# Altium PCB BSPD_2025.PcbDoc (part 2 of 2)
Units mm, origin at the board's own origin, x right, y up, seen from the top; angles counter-clockwise.
Board outline 53 x 50 mm, 2 copper layers (Top Layer, Bottom Layer); 77 components, 28 nets, 170 pads, 103 vias.
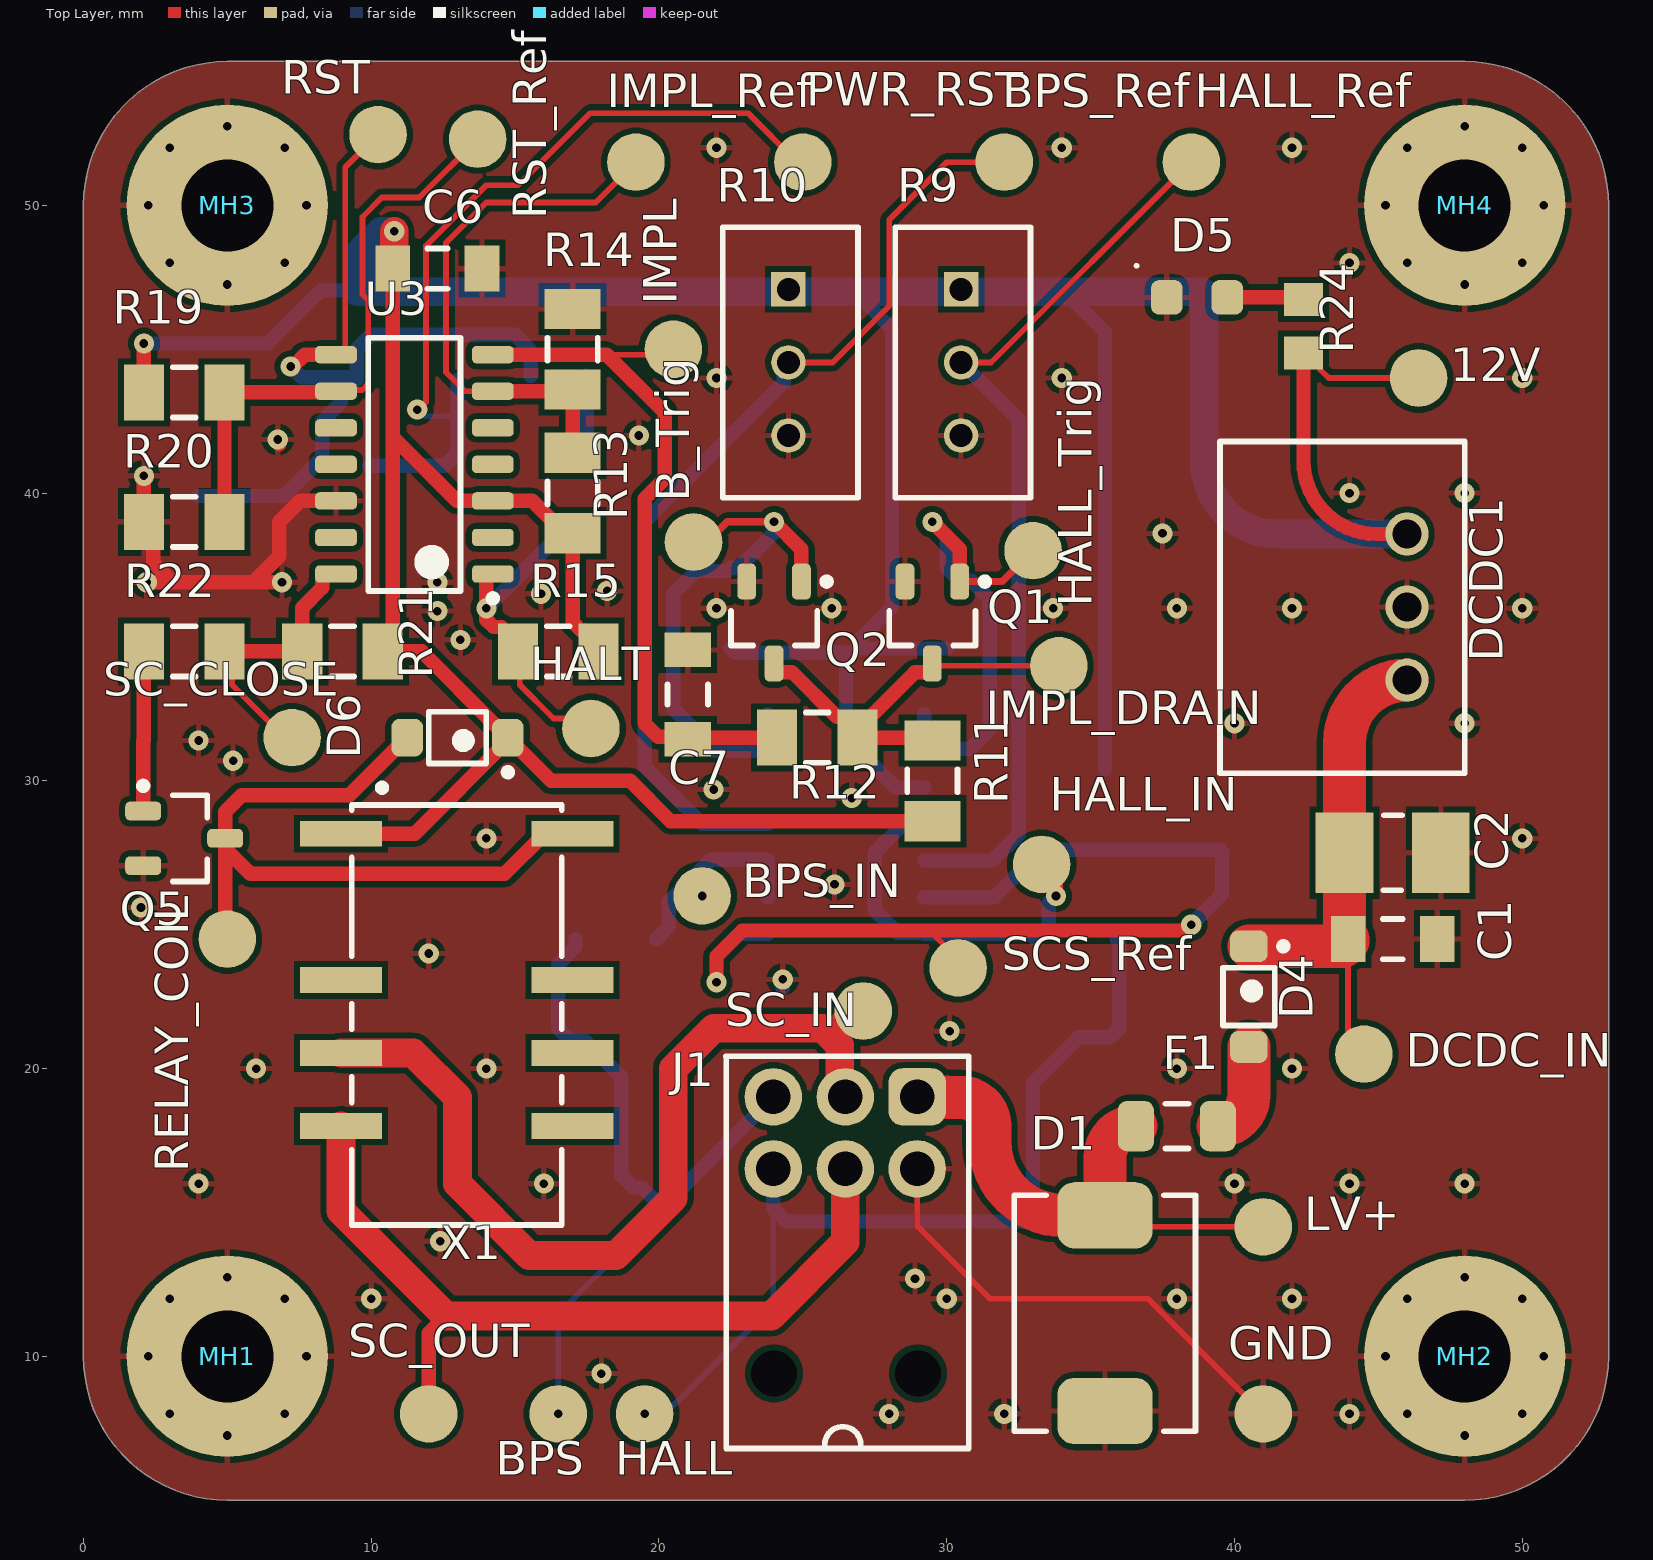
[diagram p0: Top Layer view]

## Via types
v1: diameter 0.7, hole 0.3, Top Layer to Bottom Layer, tented both sides, 103 vias

## Nets (pads, with @x,y where several pads share a name; then routed paths per layer and width w, separated by ;. In a path a pad name is that pad's centre, name@x,y a point inside that pad or via, vN(x,y) a via of type N, cw(c..) or ccw(c..) an arc to the next point about the centre after c; other vN are vias at no path point) (continued)
Halt: (continued)
  Top Layer w0.5: U3.1 14.171,37.19 14,37.019 v1(14,36) 14,35.6 14.252,35.348 14.527,35.348 15.1,34.775 R15.2
  Bottom Layer w0.5: v1(14,36) 16.6,38.6 R16.1
Implausability: C7.2 IMPL.1 R12.2 U3.7 | length 25.1
  Top Layer w0.2: 18.19,44.81 19.983,44.81 20.02,44.847 20.347,44.847 IMPL.1
  Top Layer w0.5: U3.7 18.19,44.81 20.201,42.799 20.201,40.501 19.5,39.8 19.5,32 19.968,31.532 20.918,31.532 C7.2 cw(c21.05,31.45) 21.05,31.5 R12.2
LV+_in: D1.2 F1.1 J1.1 LV+.1 | length 18.5
  Top Layer w0.2: D1.2 35.9,14.5 LV+.1
  Top Layer w1.5: J1.1 29.985,19.015 30,19 30.5,19 cw(c30.5,18) 31.5,18 31.5,17.44 ccw(c34.04,17.44) 34.04,14.9 D1.2 35.5,16.925 cw(c36.575,16.925) F1.1
NetBPS_IN_1: BPS_IN.1 R4.2 U2.9 U2.10 | length 7.8
  Bottom Layer w0.5: R4.2 20.337,24.937 20.337,25.798 21.5,26.961 ; v1(21.5,26) 21.5,26.961 ; U2.9 U2.10 23.751,27.254 21.793,27.254 21.5,26.961
NetC1_2: C1.2 C2.2 D4.K DCDC1.1 DCDC_IN.1 | length 18.1
  Top Layer w0.2: C1.2 43.95,21.05 DCDC_IN.1
  Top Layer w1.5: D4.K 43.7,24.25 ccw(c43.7,24.5) C1.2 cw(c43.95,24.625) 43.825,24.625 C2.2 43.825,31.325 cw(c46,31.325) DCDC1.1
NetC8_2: C8.2 PWR_RST.1 Q4.G R18.2 | length 28.9
  Top Layer w0.2: v1(11.6,42.9) 11.633,42.9 11.9,43.167 11.9,48.6 14,50.7 15.1,50.7 17.6,53.2 23.1,53.2 24.8,51.5 PWR_RST.1
  Bottom Layer w0.2: v1(11.6,42.9) 11.642,42.9 11.867,42.675 13,42.675
  Bottom Layer w0.5: Q4.G 12.55,40.95 R18.2 13,42.675 C8.2
NetD4_A: D4.A F1.2 | length 3.4
  Top Layer w1.5: F1.2 ccw(c39.425,19.075) 40.5,19.075 D4.A
NetD5_A: D5.A R24.1 | length 2.7
  Top Layer w0.5: D5.A 42.325,46.8 cw(c42.325,46.725) R24.1
NetD6_A: D6.A Q5.D RELAY_COIL.1 X1.12 | length 24.9
  Top Layer w0.5: RELAY_COIL.1 4.925,24.575 4.925,27.642 ; D6.A 11.25,31.414 10.952,31.115 10.856,31.115 9.24,29.5 5.5,29.5 4.925,28.925 4.925,27.642 ; X1.12 16.025,28.16 14.632,26.767 5.8,26.767 4.925,27.642
NetHALL_IN_1: HALL_IN.1 R1.2 U2.4 U2.7 | length 13.3
  Top Layer w0.5: HALL_IN.1 33.3,27.057 33.8,26.557 v1(33.8,26)
  Bottom Layer w0.5: U2.4 28.5,28.5 27.5,27.5 27.5,25.5 28.284,24.716 29.199,24.716 U2.7 32.91,24.69 R1.2 33.55,24.95 33.55,25.75 v1(33.8,26)
NetIMPL_DRAIN_1: IMPL_DRAIN.1 Q1.D Q2.D R11.2 R12.1 | length 15
  Top Layer w0.2: Q1.D 29.575,34 IMPL_DRAIN.1
  Top Layer w0.5: Q2.D 24,33.855 24.075,33.78 24.62,33.78 26.175,32.225 26.45,32.225 R12.1@26.9,31.775 ; R11.2 29.4,31.5 R12.1 R12.1@26.9,31.775 ; Q1.D 29.5,33.842 29.425,33.767 28.892,33.767 R12.1@26.9,31.775
NetIMPL_Ref_1: IMPL_Ref.1 R13.1 R14.2 U3.6 | length 19.2
  Top Layer w0.2: U3.6 13.26,43.54 12.6,44.2 12.6,48.7 14,50.1 17.8,50.1 IMPL_Ref.1
  Top Layer w0.5: U3.6 16.94,43.54 R14.2 R13.1
NetQ3_G: Q3.G R16.2 | length 2.7
  Bottom Layer w0.5: Q3.G 17.5,44.025 R16.2
NetQ5_G: Q5.G R22.2 | length 5.6
  Top Layer w0.5: Q5.G 2.075,31.387 2.1,31.412 R22.2
NetR19_1: R19.1 R20.2 RST_Ref.1 U3.9 | length 20.6
  Top Layer w0.2: U3.9 8.818,43.583 9.683,43.583 9.9,43.8 9.9,46.7 9.7,46.9 9.7,49.6 10.369,50.269 11.669,50.269 RST_Ref.1
  Top Layer w0.5: R20.2 R19.1 8.735,43.5 U3.9
Reset: C9.1 Q3.S Q4.D R17.2 RST.1 U3.8 | length 29.1
  Top Layer w0.2: U3.8 8.904,44.81 9.1,45.006 9.1,51.323 RST.1
  Top Layer w0.5: v1(7.2,44.4) 7.28,44.4 7.69,44.81 U3.8
  Bottom Layer w0.5: R17.2 6.975,39.9 Q4.D 8.3,41.225 8.3,42.5 8.95,43.15 8.95,43.6 9.3,43.95 C9.1@9.487,43.95 ; v1(7.2,44.4) 7.568,44.032 9.418,44.032 C9.1 9.5,45 10,45.5 15,45.5 15.55,44.95 Q3.S
SC_close: R21.2 R22.1 SC_CLOSE.1 U3.14 | length 10.2
  Top Layer w0.2: R22.1 5.158,34.242 5.158,33.342 7.063,31.437 7.125,31.5 SC_CLOSE.1
  Top Layer w0.5: R22.1 R21.2 7.6,36.015 8.291,36.706 8.291,37.019 8.462,37.19 U3.14
SC_in: J1.2 SC_IN.1 X1.4 | length 31.7
  Top Layer w0.2: 25.698,21.4 26.298,22 SC_IN.1
  Top Layer w1: X1.4 11.46,20.54 13,19 13,16 15.5,13.5 18.5,13.5 20.5,15.5 20.5,20 21.9,21.4 25.698,21.4 26.284,20.814 26.284,19.206 J1.2
SC_out: J1.5 SC_OUT.1 X1.5 | length 29.2
  Top Layer w0.5: SC_OUT.1 12,10.8 12.6,11.4
  Top Layer w1: X1.5 8.95,15.05 12.6,11.4 23.9,11.4 26.475,13.975 J1.5
SCS_ref_lvl: R7.2 R8.2 SCS_Ref.1 U2.6 U2.8 | length 36.6
  Top Layer w0.2: 29.4,24.8 30.184,24.016 30.184,23.932 30.4,23.716 SCS_Ref.1
  Top Layer w0.5: v1(22,23) 22,23.9 22.9,24.8 29.4,24.8 38.3,24.8 v1(38.5,25)
  Bottom Layer w0.5: v1(22,23) 22,23.9 22.784,24.684 23.769,24.684 U2.8 ; U2.6 31.66,25.96 33.3,27.6 R7.2 39.5,27.6 R8.2 39.568,27.468 39.568,26.068 v1(38.5,25)
pads on no net: J1.7 U3.2 U3.4 U3.5 U3.10 U3.11 U3.13 X1.3 X1.8 X1.9 X1.10

## Polygon pours and split planes (outlines as drawn)
GND on Bottom Layer "GND_L02_P001" (solid, pour order 1): 0,10 0,50 cw(c5,50) 5,55 48,55 cw(c48,50) 53,50 53,10 cw(c48,10) 48,5 5,5 cw(c5,10)
GND on Top Layer "GND_L01_P000" (solid, pour order 0): 0,10 0,50 cw(c5,50) 5,55 48,55 cw(c48,50) 53,50 53,10 cw(c48,10) 48,5 5,5 cw(c5,10)

## Silkscreen, mask and mechanical layers (free items; w line width, h text height)
Bottom Overlay:
  drawing of 46 lines, arcs and shapes, not listed
  text "BSPD" at 12.495,26.25 h5
  text "Guillem Ropero" at 12.75,23.775 h2.5
  text "& Edu Perarnau" at 12.75,22 h2
Mechanical 1:
  the board outline again, w0.5